# Altium PCB CAR_BOARD_2024-07-15.pcbdoc (part 1 of 2)
Units mil, origin at the board's own origin, x right, y up, seen from the top; angles counter-clockwise.
Board outline 4100 x 4517.05 mil, 2 copper layers (Top Layer, Bottom Layer); 71 components, 75 nets, 312 pads, 373 vias.
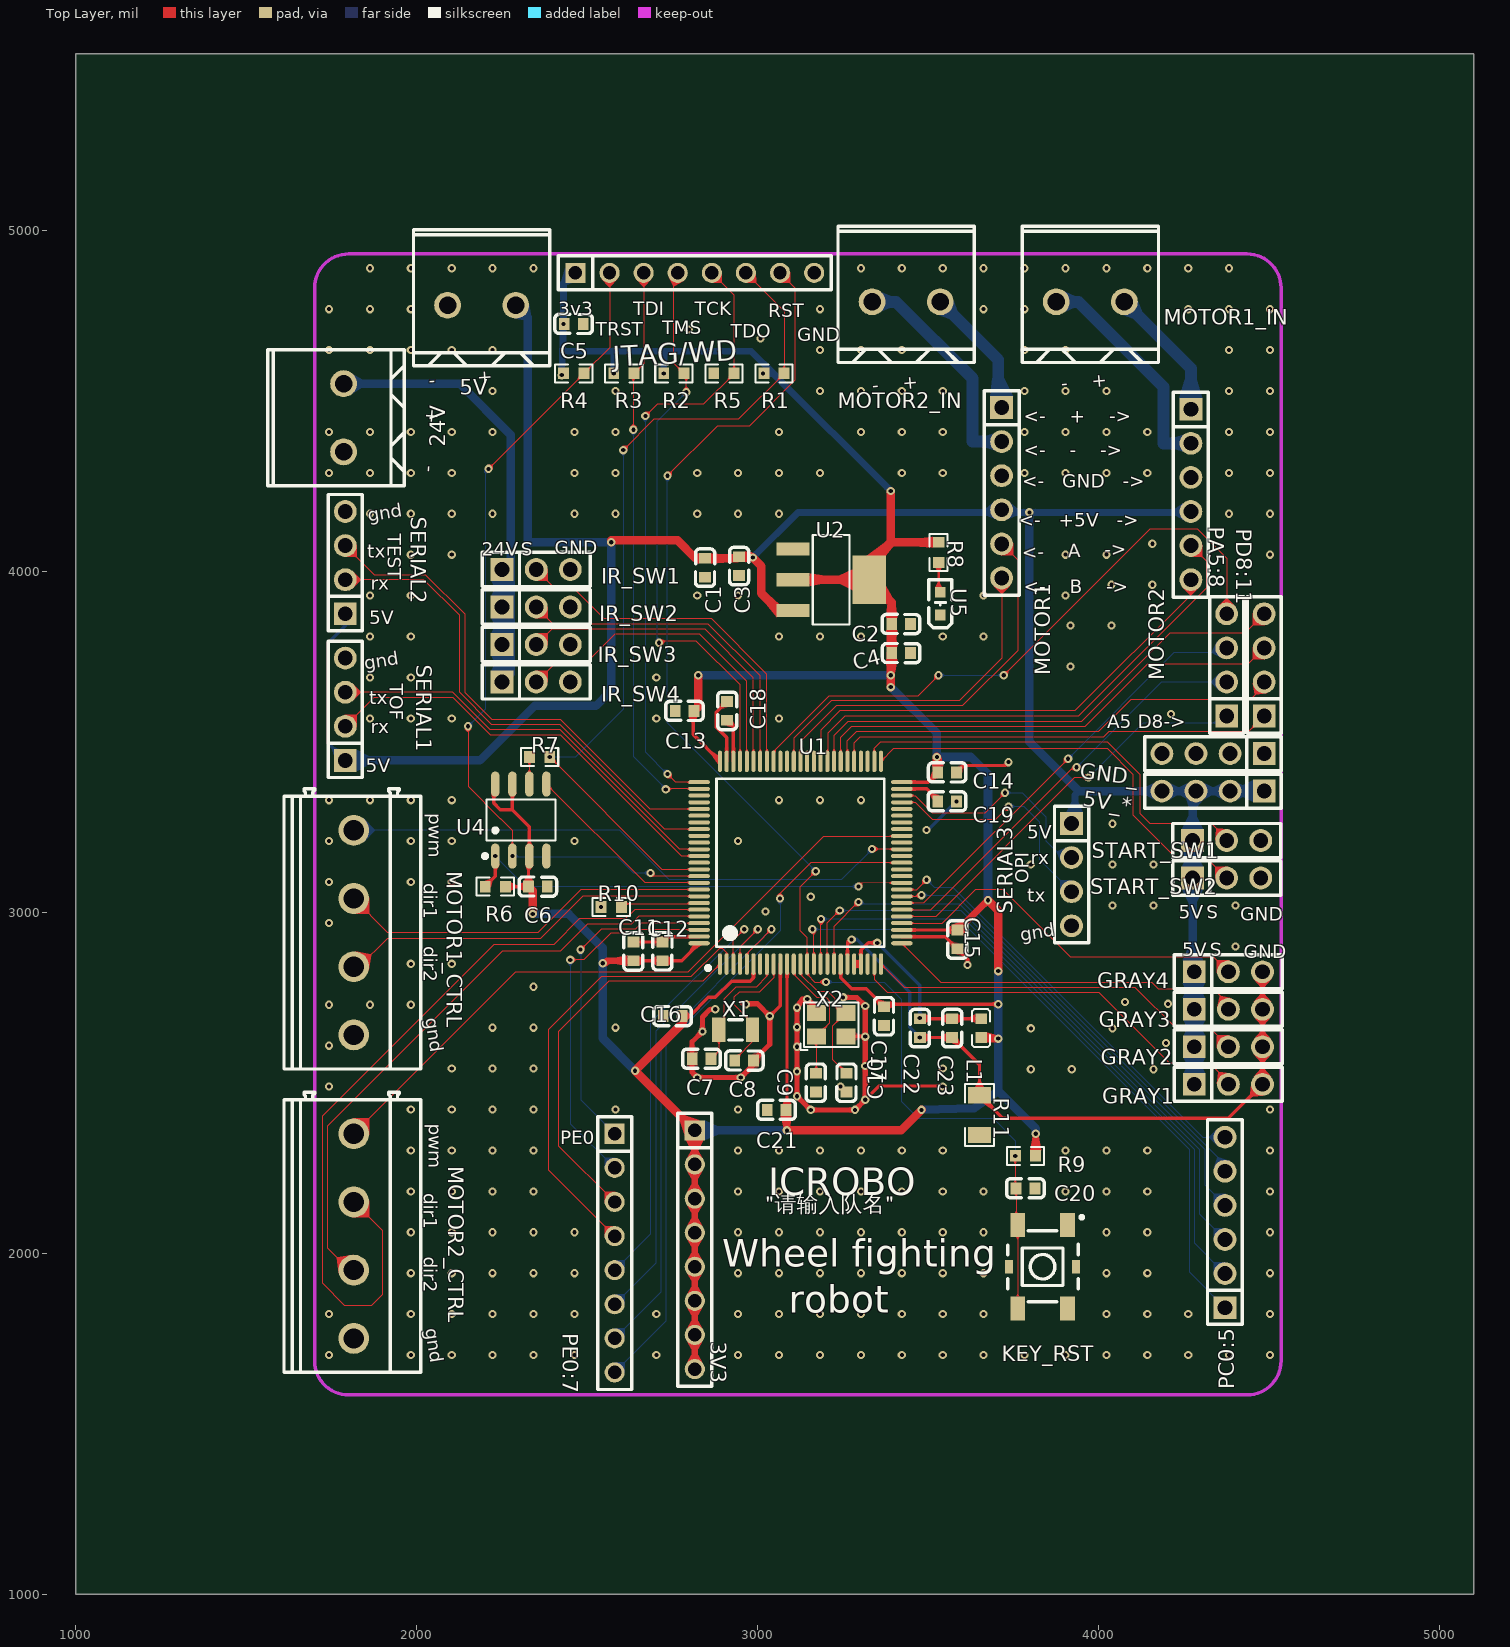
[diagram p0: Top Layer view]
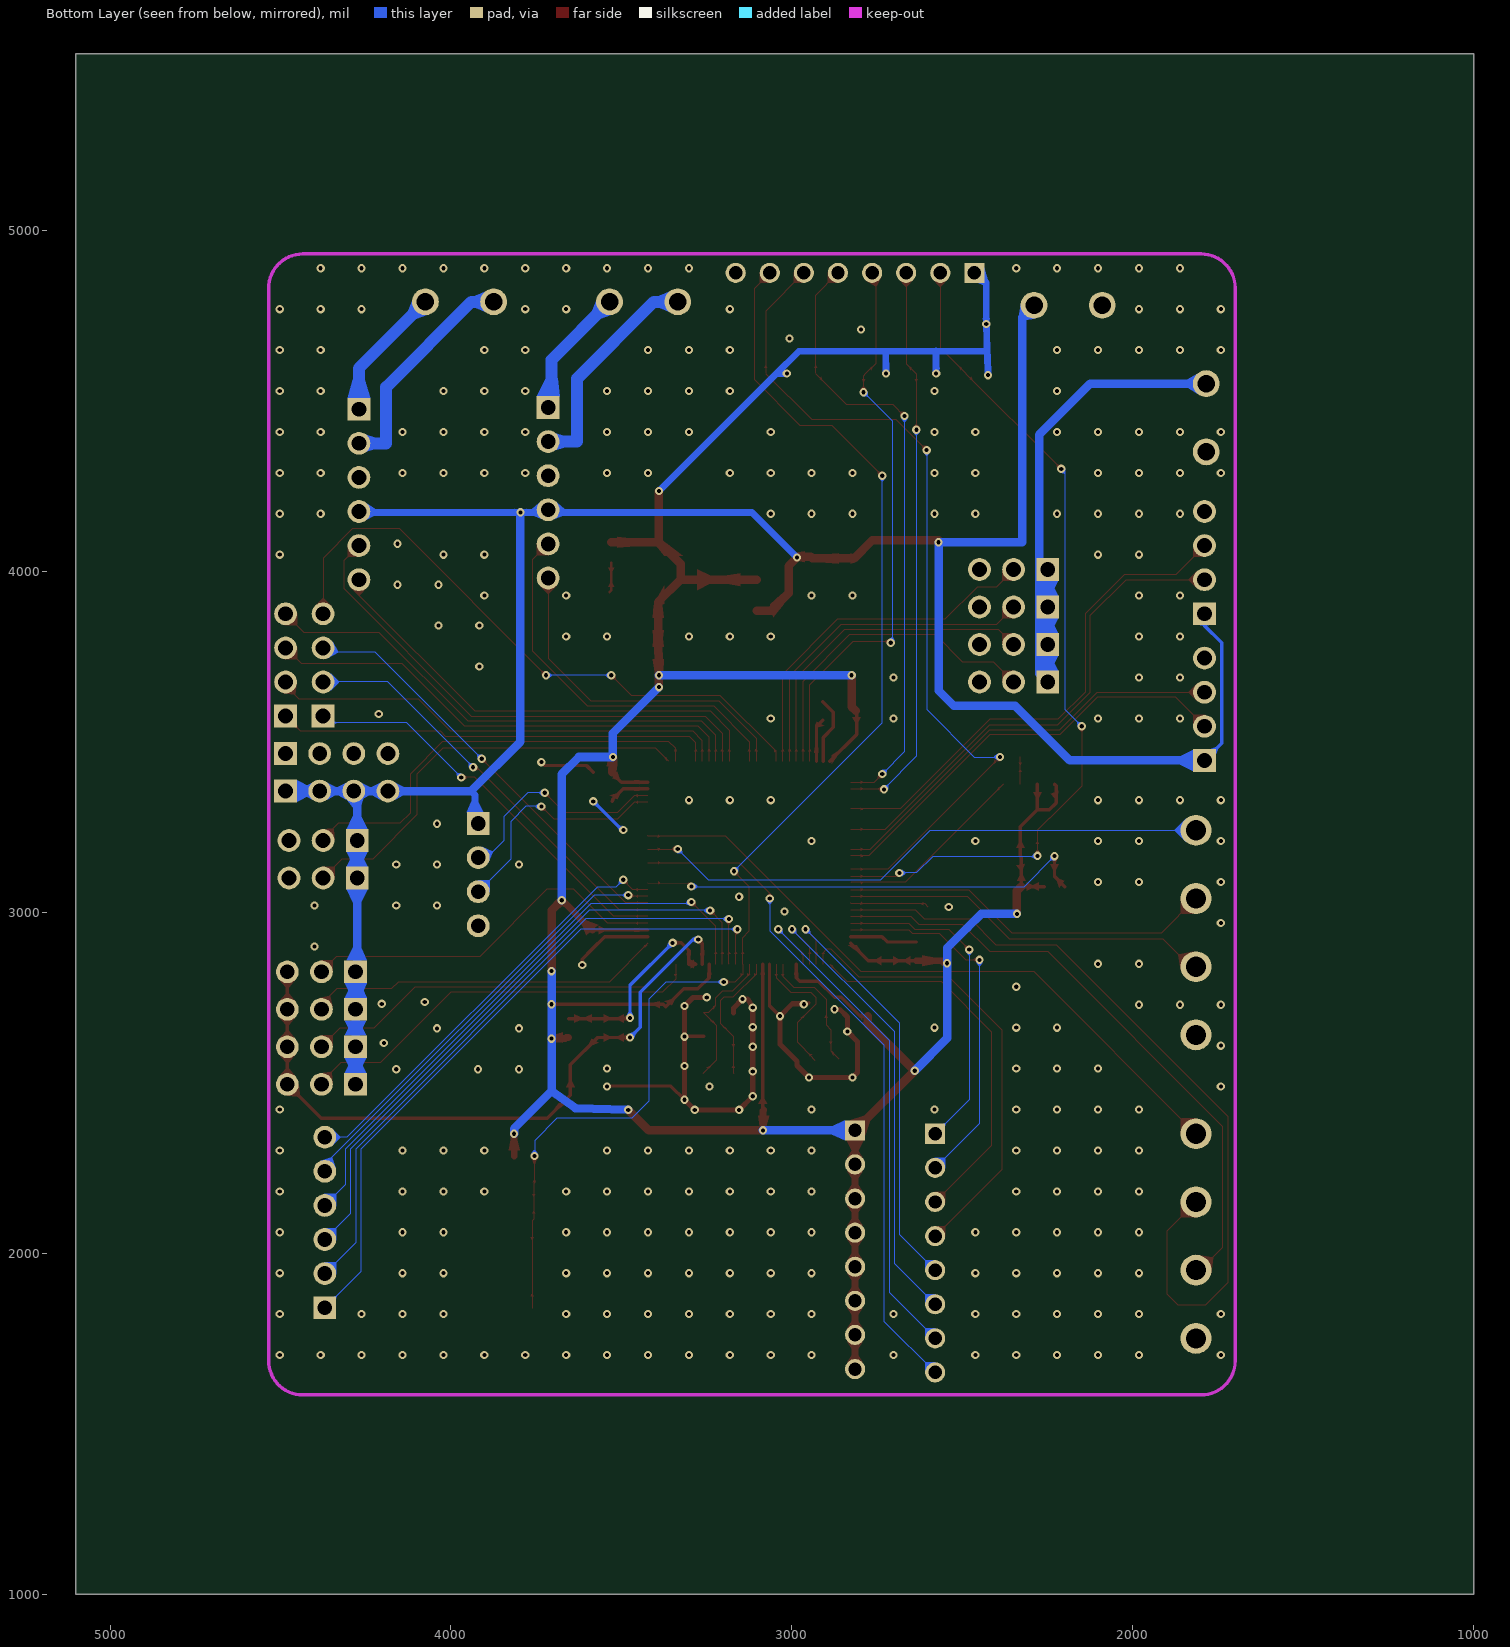
[diagram p1: Bottom Layer view, seen from below]

## Layer stack, top to bottom
Top Layer: signal copper (thickness not stored)
Dielectric: dielectric 12.6, FR-4, Dk 4.8
Bottom Layer: signal copper (thickness not stored)

## Board outline
5100,1000 1000,1000 1000,5517.05 5100,5517.05

## Components (designator, comment, footprint, x,y, rotation, side; value= is the part's Value field where it differs from the comment)
3V3 "PZ254V-11-08P" HDR-TH_8P-P2.54-V-M 2815,2010 r270 top
5V "WJ500V-5.08-2P-14-00A" CONN-TH_2P-P5.00_WJ500V-5.08-2P 2190,4780 r0 top
5V_* "PZ254V-11-04P_C2691448" HDR-TH_4P-P2.54-V-M 4335,3355 r180 top
24V "WJ500V-5.08-2P-14-00A" CONN-TH_2P-P5.00_WJ500V-5.08-2P 1785,4450 r90 top
C1 "10uF" C0603 2845,4010 r270 top
C2 "10uF" C0603 3420,3845 r0 top
C3 "100nF" C0603 2945,4015 r90 top
C4 "100nF" C0603 3420,3760 r180 top
C5 "100nF" C0603 2460,4725 r0 top
C6 "10uF" C0603 2355,3075 r0 top
C7 "12pF" C0603 2835,2570 r0 top
C8 "12pF" C0603 2960,2565 r180 top
C9 "20pF" C0603 3170,2500 r90 top
C10 "20pF" C0603 3260,2500 r90 top
C11 "10uF" C0603 2635,2885 r90 top
C12 "100nF" C0603 2720,2885 r270 top
C13 "100nF" C0603 2785,3590 r0 top
C14 "100nF" C0603 3555,3410 r180 top
C15 "100nF" C0603 3585,2920 r90 top
C16 "100nF" C0603 2750,2695 r0 top
C17 "100nF" C0603 3370,2695 r90 top
C18 "10uF" C0603 2910,3590 r270 top
C19 "10uF" C0603 3555,3325 r0 top
C20 "100nF" C0603 3785,2190 r0 top
C21 "100nF" C0603 3055,2420 r0 top
C22 "100nF" C0603 3475,2660 r90 top
C23 "1uF" C0603 3570,2660 r90 top
GND_ "PZ254V-11-04P_C2691448" HDR-TH_4P-P2.54-V-M 4335,3465 r180 top
GRAY1 "PZ254V-11-03P_C2937625" HDR-TH_3P-P2.54-V-M 4380,2495 r0 top
GRAY2 "PZ254V-11-03P_C2937625" HDR-TH_3P-P2.54-V-M 4380,2605 r0 top
GRAY3 "PZ254V-11-03P_C2937625" HDR-TH_3P-P2.54-V-M 4380,2715 r0 top
GRAY4 "PZ254V-11-03P_C2937625" HDR-TH_3P-P2.54-V-M 4380,2825 r0 top
IR_SW1 "PZ254V-11-03P_C2937625" HDR-TH_3P-P2.54-V-M 2350,4005 r0 top
IR_SW2 "PZ254V-11-03P_C2937625" HDR-TH_3P-P2.54-V-M 2350,3895 r0 top
IR_SW3 "PZ254V-11-03P_C2937625" HDR-TH_3P-P2.54-V-M 2350,3785 r0 top
IR_SW4 "PZ254V-11-03P_C2937625" HDR-TH_3P-P2.54-V-M 2350,3675 r0 top
JTAG/WD "PZ254V-11-08P" HDR-TH_8P-P2.54-V-M 2815,4875 r0 top
KEY_RST "TP10321620" SW-SMD_ROCPUSWITCHES_TP1032 3835,1960 r0 top
L1 "600Ω" L0603 3655,2660 r90 top
MOTOR1 "PZ254V-11-06P" HDR-TH_6P-P2.54-V-M 3715,4230 r270 top
MOTOR1_CTRL "DB128V-5.08-4P-GN-S" CONN-TH_4P-P5.08_DIBO_DB128V-5.08 1815,2940 r270 top
MOTOR1_IN "WJ500V-5.08-2P-14-00A" CONN-TH_2P-P5.00_WJ500V-5.08-2P 3975,4790 r0 top
MOTOR2 "PZ254V-11-06P" HDR-TH_6P-P2.54-V-M 4270,4225 r270 top
MOTOR2_CTRL "DB128V-5.08-4P-GN-S" CONN-TH_4P-P5.08_DIBO_DB128V-5.08 1815,2050 r270 top
MOTOR2_IN "WJ500V-5.08-2P-14-00A" CONN-TH_2P-P5.00_WJ500V-5.08-2P 3435,4790 r0 top
PA5:8 "PZ254V-11-04P_C2691448" HDR-TH_4P-P2.54-V-M 4375,3725 r90 top
PC0:5 "PZ254V-11-06P" HDR-TH_6P-P2.54-V-M 4370,2090 r90 top
PD8:11 "PZ254V-11-04P_C2691448" HDR-TH_4P-P2.54-V-M 4485,3725 r90 top
PE0:7 "PZ254V-11-08P" HDR-TH_8P-P2.54-V-M 2580,2000 r270 top
R1 "10kΩ" R0603 3047.36,4580 r180 top
R2 "10kΩ" R0603 2753.68,4580 r180 top
R3 "10kΩ" R0603 2606.84,4580 r180 top
R4 "10kΩ" R0603 2460,4580 r180 top
R5 "10kΩ" R0603 2900.52,4580 r0 top
R6 "10kΩ" R0603 2230,3075 r0 top
R7 "22Ω" R0603 2360,3455 r0 top
R8 "510Ω" R0603 3530,4055 r90 top
R9 "10kΩ" R0603 3785,2285 r0 top
R10 "10kΩ" R0603 2570,3015 r180 top
R11 "0Ω" R1206 3650,2405 r90 top
SERIAL1 "PZ254V-11-04P_C2691448" HDR-TH_4P-P2.54-V-M 1790,3595 r90 top
SERIAL2 "PZ254V-11-04P_C2691448" HDR-TH_4P-P2.54-V-M 1790,4025 r90 top
SERIAL3 "PZ254V-11-04P_C2691448" HDR-TH_4P-P2.54-V-M 3920,3110 r270 top
START_SW1 "PZ254V-11-03P_C2937625" HDR-TH_3P-P2.54-V-M 4375,3210.04 r0 top
START_SW2 "PZ254V-11-03P_C2937625" HDR-TH_3P-P2.54-V-M 4375,3100.04 r0 top
U1 "STM32F407VET6" LQFP-100_L14.0-W14.0-P0.50-LS16.0-BL 3125,3145 r0 top
U2 "AMS1117-3.3V" SOT-223-4_L6.5-W3.5-P2.30-LS7.0-BR 3215,3975 r180 top
U4 "W25Q16JVSNIQ TR" SOP-8_L4.9-W3.9-P1.27-LS6.0-BL 2305,3270 r0 top
U5 "0603LED" LED0603-R-RD_RED 3535,3905 r90 top
X1 "32.768kHz" FC-135R_L3.2-W1.5 2935,2655 r180 top
X2 "12MHz" OSC-SMD_4P-L3.2-W2.5-BL 3215,2670.03 r0 top

## Footprints (in the part's own frame and the unit in brackets; to place one, negate y for a bottom-side part, rotate by r counter-clockwise, add the part's x,y. Pads: shape width x height; smd on the part's side, far side on the other; paste and mask are expansions set on the pad)
C0603 [mm]
  rect 0.8x0.9 smd paste+0 mask+0.051: 1(-0.7,0) 2(0.7,0)
  silkscreen extent -1.41,-0.71 1.39,0.72
CONN-TH_2P-P5.00_WJ500V-5.08-2P [mm]
  round 2 hole 1.3 paste+0 mask+0.051: 1(-2.54,0) 2(2.54,0)
  silkscreen extent -5.08,-4.52 5.08,5.64
CONN-TH_4P-P5.08_DIBO_DB128V-5.08 [mm]
  round 2.3 hole 1.5 paste+0 mask+0.05: 1(-7.62,0) 2(-2.54,0) 3(2.54,0) 4(7.62,0)
  silkscreen extent -10.72,-5.2 10.16,5
FC-135R_L3.2-W1.5 [mm]
  rect 1x1.8 smd paste+0 mask+0.051: 1(-1.25,0) 2(1.25,0)
  silkscreen extent -0.51,-0.76 0.51,0.76
HDR-TH_3P-P2.54-V-M [mm]
  rect 1.7x1.7 hole 1.1 paste+0 mask+0.051: 1(-2.54,0)
  round 1.7 hole 1.1 paste+0 mask+0.051: 2(0,0) 3(2.54,0)
  silkscreen extent -4.02,-1.27 4.02,1.27
HDR-TH_4P-P2.54-V-M [mm]
  rect 1.7x1.7 hole 1.1 paste+0 mask+0.051: 1(-3.81,0)
  round 1.7 hole 1.1 paste+0 mask+0.051: 2(-1.27,0) 3(1.27,0) 4(3.81,0)
  silkscreen extent -5.08,-1.27 5.08,1.27
HDR-TH_6P-P2.54-V-M [mm]
  rect 1.7x1.7 hole 1.1 paste+0 mask+0.051: 1(-6.35,0)
  round 1.7 hole 1.1 paste+0 mask+0.051: 2(-3.81,0) 3(-1.27,0) 4(1.27,0) 5(3.81,0) 6(6.35,0)
  silkscreen extent -7.6,-1.3 7.65,1.3
HDR-TH_8P-P2.54-V-M [mm]
  rect 1.5x1.5 hole 1 paste+0 mask+0.051: 1(-8.89,0)
  round 1.5 hole 1 paste+0 mask+0.051: 2(-6.35,0) 3(-3.81,0) 4(-1.27,0) 5(1.27,0) 6(3.81,0) 7(6.35,0) 8(8.89,0)
  silkscreen extent -10.16,-1.27 10.16,1.27
L0603 [mm]
  rect 0.8x0.864 smd paste-100 mask+0.051: 1(-0.7,0) 2(0.7,0)
  silkscreen extent -1.42,-0.65 1.41,0.67
LED0603-R-RD_RED [mm]
  rect 0.8x0.8 smd paste+0 mask+0.051: 1(0.851,0) 2(-0.851,0)
  silkscreen extent -1.82,-0.86 1.77,0.86
LQFP-100_L14.0-W14.0-P0.50-LS16.0-BL [mm]
  oval 0.3x1.6 smd paste-100 mask+0.051: 1(-6,-7.55) 2(-5.5,-7.55) 3(-5,-7.55) 4(-4.5,-7.55) 5(-4,-7.55) 6(-3.5,-7.55) 7(-3,-7.55) 8(-2.5,-7.55) 9(-2,-7.55) 10(-1.5,-7.55) 11(-1,-7.55) 12(-0.5,-7.55) 13(0,-7.55) 14(0.5,-7.55) 15(1,-7.55) 16(1.5,-7.55) 17(2,-7.55) 18(2.5,-7.55) 19(3,-7.55) 20(3.5,-7.55) 21(4,-7.55) 22(4.5,-7.55) 23(5,-7.55) 24(5.5,-7.55) 25(6,-7.55) 51(6,7.55) 52(5.5,7.55) 53(5,7.55) 54(4.5,7.55) 55(4,7.55) 56(3.5,7.55) 57(3,7.55) 58(2.5,7.55) 59(2,7.55) 60(1.5,7.55) 61(1,7.55) 62(0.5,7.55) 63(0,7.55) 64(-0.5,7.55) 65(-1,7.55) 66(-1.5,7.55) 67(-2,7.55) 68(-2.5,7.55) 69(-3,7.55) 70(-3.5,7.55) 71(-4,7.55) 72(-4.5,7.55) 73(-5,7.55) 74(-5.5,7.55) 75(-6,7.55)
  oval 1.6x0.3 smd paste-100 mask+0.051: 26(7.55,-6) 27(7.55,-5.5) 28(7.55,-5) 29(7.55,-4.5) 30(7.55,-4) 31(7.55,-3.5) 32(7.55,-3) 33(7.55,-2.5) 34(7.55,-2) 35(7.55,-1.5) 36(7.55,-1) 37(7.55,-0.5) 38(7.55,0) 39(7.55,0.5) 40(7.55,1) 41(7.55,1.5) 42(7.55,2) 43(7.55,2.5) 44(7.55,3) 45(7.55,3.5) 46(7.55,4) 47(7.55,4.5) 48(7.55,5) 49(7.55,5.5) 50(7.55,6) 76(-7.55,6) 77(-7.55,5.5) 78(-7.55,5) 79(-7.55,4.5) 80(-7.55,4) 81(-7.55,3.5) 82(-7.55,3) 83(-7.55,2.5) 84(-7.55,2) 85(-7.55,1.5) 86(-7.55,1) 87(-7.55,0.5) 88(-7.55,0) 89(-7.55,-0.5) 90(-7.55,-1) 91(-7.55,-1.5) 92(-7.55,-2) 93(-7.55,-2.5) 94(-7.55,-3) 95(-7.55,-3.5) 96(-7.55,-4) 97(-7.55,-4.5) 98(-7.55,-5) 99(-7.55,-5.5) 100(-7.55,-6)
  silkscreen extent -7.03,-8 6.25,6.25
OSC-SMD_4P-L3.2-W2.5-BL [mm]
  rect 1.4x1.2 smd paste+0 mask+0.051: 1(-1.1,-0.875) 2(1.1,-0.875) 3(1.1,0.875) 4(-1.1,0.875)
  silkscreen extent -2.29,-1.9 2.03,1.65
R0603 [mil]
  rect 31.75x34.02 smd paste-3937.01 mask+2: 1(-29.66,0) 2(29.66,0)
  silkscreen extent -55,-26 55,26
R1206 [mil]
  rect 47.54x66.97 smd paste-3937.01 mask+2: 1(-58.22,0) 2(58.22,0)
  silkscreen extent -91,-42 91,42
SOP-8_L4.9-W3.9-P1.27-LS6.0-BL [mm]
  oval 0.63x1.865 smd paste+0 mask+0.051: 1(-1.905,-2.682) 2(-0.635,-2.682) 3(0.635,-2.682) 4(1.905,-2.682) 5(1.905,2.683) 6(0.635,2.683) 7(-0.635,2.683) 8(-1.905,2.683)
  silkscreen extent -2.82,-2.83 2.58,1.52
SOT-223-4_L6.5-W3.5-P2.30-LS7.0-BR [mm]
  rect 2.47x0.98 smd paste+0 mask+0.051: 1(2.835,-2.3) 2(2.835,0) 3(2.835,2.3)
  rect 2.47x3.6 smd paste+0 mask+0.051: 4(-2.835,0)
  silkscreen extent -1.37,-3.33 1.37,3.33
SW-SMD_ROCPUSWITCHES_TP1032 [mm]
  rect 1.1x1.8 smd paste+0 mask+0.051: 1(1.85,3.1) 2(1.85,-3.1) 3(-1.85,3.1) 4(-1.85,-3.1)
  rect 0.6x1 smd paste+0 mask+0.051: 5(2.5,0) 6(-2.5,0)
  silkscreen extent -2.6,-2.6 3.05,3.81

## Via types
v1: diameter 24, hole 12, Top Layer to Bottom Layer, tented both sides, 284 vias
v2: diameter 24.41, hole 12.2, Top Layer to Bottom Layer, tented both sides, 89 vias

## Nets (pads, with @x,y where several pads share a name; then routed paths per layer and width w, separated by ;. In a path a pad name is that pad's centre, name@x,y a point inside that pad or via, vN(x,y) a via of type N, cw(c..) or ccw(c..) an arc to the next point about the centre after c; other vN are vias at no path point)
24V: 24V.2 IR_SW1.1 IR_SW2.1 IR_SW3.1 IR_SW4.1 | length 1617.9
  Bottom Layer w25: 24V.2@1785,4550 2125,4550.04 2275,4400.04 2275,3699.64 IR_SW4.1@2250,3674.64 ; IR_SW4.1@2250,3675 IR_SW3.1@2250,3785 IR_SW2.1@2250,3895 IR_SW1.1@2250,4005
+5V: 5V.2 5V_*.1 5V_*.2 5V_*.3 5V_*.4 C1.1 C3.2 GRAY1.1 GRAY2.1 GRAY3.1 GRAY4.1 MOTOR1.4 MOTOR2.4 SERIAL1.1 SERIAL2.1 SERIAL3.1 START_SW1.1 START_SW2.1 U2.3 | length 7832.1
  Top Layer w25: v2(2570,4085) 2570,4090.04 2765,4090.04 2817.4,4037.54 2845,4037.54 2940,4037.54 2945,4042.54 2982.4,4042.54 v2(2985,4040) 3010,4015.04 3010,3935.04 3060.6,3884.44 U2.3@3103.39,3884.45
  Bottom Layer w10: SERIAL1.1@1790,3445 1740,3495.04 1740,3790.04 1790,3840.04 SERIAL2.1@1790,3875
  Bottom Layer w20: v2(2985,4040) 3117.53,4172.53 v2(3796.3,4172.53) ; MOTOR1.4@3710,4165 3710,4175 MOTOR1.4@3715,4180 3722.47,4172.53 v2(3796.3,4172.53) ; SERIAL3.1@3920,3260 3930,3270.04 3930,3343.74 3941.3,3355.04 ; MOTOR2.4@4270,4175 4267.53,4172.53 v2(3796.3,4172.53)
  Bottom Layer w25: SERIAL1.1@1790,3445 2185,3445.04 2345,3605.04 2525,3605.04 2570,3650.04 v2(2570,4085) ; 5V.2@2290,4780 2325,4745 2325,4085 v2(2570,4085) ; v2(3796.3,4172.53) 3796.3,3500 3941.3,3355 5V_*.4@4185,3355 5V_*.3@4300,3355 ; GRAY4.1@4280,2825 GRAY2.1@4280,2605 GRAY1.1@4280,2495 GRAY3.1@4280,2715 4275,2715.04 START_SW1.1@4275,3210.04 START_SW2.1@4275,3100.04 4275,3345.04 5V_*.3@4285,3355 ; 5V_*.3@4285,3355 5V_*.2@4400,3355 ; 5V_*.2@4385,3355 5V_*.1@4500,3355.04
FLASH_CS: R6.1 U1.35 U4.1 | length 1335
  Top Layer w3.5: v2(3295,3075) 3305,3085.04 U1.35@3422.24,3085.94
  Top Layer w10: R6.1@2200.34,3075 2230,3105.04 v2(2230,3164.4)
  Bottom Layer w3.5: v2(2230,3164.4) 2319.39,3075 v2(3295,3075)
GND: 5V.1 24V.1 C1.2 C2.2 C3.1 C4.1 C5.2 C6.2 C7.1 C8.1 C9.1 C10.1 C11.2 C12.1 C13.1 C14.1 C15.1 C16.1 C17.1 C18.1 C19.2 C20.2 C21.1 GND_.1 GND_.2 GND_.3 GND_.4 IR_SW1.3 IR_SW2.3 IR_SW3.3 IR_SW4.3 JTAG/WD.8 KEY_RST.1 KEY_RST.2 KEY_RST.5 KEY_RST.6 MOTOR1.3 MOTOR1_CTRL.4 MOTOR2.3 MOTOR2_CTRL.4 R5.1 R10.2 R11.1 SERIAL1.4 SERIAL2.4 SERIAL3.4 START_SW1.3 START_SW2.3 U1.10 U1.27 U1.74 U1.99 U2.1 U4.4 U5.2 X2.2 X2.4 | length 3014.9
  Top Layer w10: C11.2@2635,2912.54 2720,2912.54 2735.9,2928.44 U1.99@2827.8,2928.44 ; U1.74@2908.46,3442.24 2908.5,3512.24 2878.5,3542.24 2878.5,3586.04 C18.1@2910,3617.54 ; 2950,2735 2955,2730 v2(2965,2730) ; v2(3035,2695) 3065.9,2725.94 U1.10@3065.9,2847.74 ; X2.2@3258.3,2635.54 v2@3315,2635.54 ; v2(3315,2450) 3355,2490 v1@3540,2490 ; U1.27@3422.2,2928.44 3549,2928.44 C15.1@3585,2892.45 3615,2862.44 v2(3615,2845) ; C14.1@3582.55,3410 3602.6,3430.04 3725,3430.04 v2(3735,3440)
  Top Layer w15: v2(2875,2715) 2860,2715.04 2837.4,2692.44 v2(2837.44,2650) 2807.4,2620.04 C7.1@2807.45,2570 2807.4,2530.04 v2(2822.44,2515) v2(2950,2515) 2985,2550.04 2985,2562.44 C8.1@2987.55,2565 3035,2612.44 v2(3035,2695) ; v2@2968.8,2731.2 2998.8,2731.2 v2(3035,2695) 3033.8,2696.2 v2@3028.8,2696.2 ; v2(3145,2745) 3130,2745 v2(3115,2720) v2(3115,2662.68) v2(3115,2605) v2(3115,2532.91) v2(3115,2460) v2(3155,2420) v2(3285,2420) v2(3315,2450) v2(3315,2548.91) v2(3315,2634.89) v2(3315,2725) 3290,2750 v2(3250,2750) ; v2(3145,2745) 3171.7,2718.34 X2.4@3171.7,2704.49
  Bottom Layer w10: v1@3495,3240 3500,3245 3502.56,3245 v2(3582.56,3325)
  other v1: 1742.2,1701.09 1982.2,1701.09 2102.2,1701.09 2222.2,1701.09 2342.2,1701.09 2462.2,1701.09 2702.2,1701.09 2942.2,1701.09 3062.2,1701.09 3182.2,1701.09 3302.2,1701.09 3422.2,1701.09 3542.2,1701.09 3662.2,1701.09 3782.2,1701.09 3902.2,1701.09 4022.2,1701.09 4142.2,1701.09 4262.2,1701.09 4382.2,1701.09 4502.2,1701.09 1742.2,1821.09 1982.2,1821.09 2102.2,1821.09 2222.2,1821.09 2342.2,1821.09 2462.2,1821.09 2702.2,1821.09 2942.2,1821.09 3062.2,1821.09 3182.2,1821.09 3302.2,1821.09 3422.2,1821.09 3542.2,1821.09 3662.2,1821.09 4022.2,1821.09 4142.2,1821.09 4262.2,1821.09 4502.2,1821.09 1982.2,1941.09 2102.2,1941.09 2222.2,1941.09 2342.2,1941.09 2462.2,1941.09 2942.2,1941.09 3062.2,1941.09 3182.2,1941.09 3302.2,1941.09 3422.2,1941.09 3542.2,1941.09 3662.2,1941.09 4022.2,1941.09 4142.2,1941.09 4502.2,1941.09 1982.2,2061.09 2102.2,2061.09 2222.2,2061.09 2342.2,2061.09 2462.2,2061.09 2942.2,2061.09 3062.2,2061.09 3182.2,2061.09 3302.2,2061.09 3422.2,2061.09 3542.2,2061.09 3662.2,2061.09 4022.2,2061.09 4142.2,2061.09 4502.2,2061.09 1982.2,2181.09 2102.2,2181.09 2222.2,2181.09 2342.2,2181.09 2942.2,2181.09 3062.2,2181.09 3182.2,2181.09 3302.2,2181.09 3422.2,2181.09 3542.2,2181.09 3662.2,2181.09 3902.2,2181.09 4022.2,2181.09 4142.2,2181.09 4502.2,2181.09 1982.2,2301.09 2102.2,2301.09 2222.2,2301.09 2342.2,2301.09 2942.2,2301.09 3062.2,2301.09 3182.2,2301.09 3302.2,2301.09 3422.2,2301.09 3542.2,2301.09 3902.2,2301.09 4022.2,2301.09 4142.2,2301.09 4502.2,2301.09 1982.2,2421.09 2102.2,2421.09 2222.2,2421.09 2342.2,2421.09 2582.2,2421.09 2942.2,2421.09 4502.2,2421.09 1742.2,2488.4 3242.2,2488.4 3542.2,2488.4 3800.55,2539.33 3920.55,2539.33 4160.55,2539.33 2102.2,2541.09 2222.2,2541.09 2342.2,2541.09 3542.2,2541.09 1742.2,2608.4 4196.96,2616.09 3800.55,2659.33 4040.55,2659.33 2222.2,2661.09 2342.2,2661.09 2582.2,2661.09 1742.2,2728.4 1862.2,2728.4 1982.2,2728.4 4203.06,2731.09 4076.96,2736.09 2342.2,2781.09 1982.2,2848.4 2102.2,2848.4 4400.55,2899.33 1742.2,2968.4 3022.03,3001.6 4040.55,3019.33 4160.55,3019.33 4400.55,3019.33 1742.2,3088.4 1982.2,3088.4 2102.2,3088.4 3800.55,3139.33 4040.55,3139.33 4160.55,3139.33 1742.2,3208.4 1982.2,3208.4 2102.2,3208.4 2462.2,3208.4 2942.2,3208.4 3494.57,3241.3 4040.55,3259.33 1742.2,3328.4 1862.2,3328.4 1982.2,3328.4 2102.2,3328.4 3062.2,3328.4 3182.2,3328.4 3302.2,3328.4 1862.2,3568.4 1982.2,3568.4 2102.2,3568.4 2702.2,3568.4 3062.2,3568.4 4211.96,3581.09 1862.2,3688.4 1982.2,3688.4 2702.2,3688.4 3916.96,3720.34 1862.2,3808.4 1982.2,3808.4 3062.2,3808.4 3182.2,3808.4 3302.2,3808.4 3542.2,3808.4 3662.2,3808.4 3916.96,3840.34 4036.96,3840.34 1862.2,3928.4 1982.2,3928.4 2822.2,3928.4 2942.2,3928.4 3662.2,3928.4 3902.2,3928.4 4036.96,3960.34 4156.96,3960.34 1982.2,4048.4 2102.2,4048.4 3902.2,4048.4 4022.2,4048.4 4502.2,4048.4 4156.96,4080.34 1862.2,4168.4 1982.2,4168.4 2102.2,4168.4 2222.2,4168.4 2462.2,4168.4 2582.2,4168.4 2822.2,4168.4 2942.2,4168.4 3062.2,4168.4 4382.2,4168.4 4502.2,4168.4 1742.2,4288.4 1862.2,4288.4 1982.2,4288.4 2102.2,4288.4 2462.2,4288.4 2582.2,4288.4 2822.2,4288.4 2942.2,4288.4 3062.2,4288.4 3182.2,4288.4 3422.2,4288.4 3542.2,4288.4 3782.2,4288.4 3902.2,4288.4 4022.2,4288.4 4142.2,4288.4 4382.2,4288.4 4502.2,4288.4 1742.2,4408.4 1862.2,4408.4 1982.2,4408.4 2102.2,4408.4 2222.2,4408.4 2462.2,4408.4 2582.2,4408.4 3062.2,4408.4 3302.2,4408.4 3422.2,4408.4 3542.2,4408.4 3782.2,4408.4 3902.2,4408.4 4022.2,4408.4 4142.2,4408.4 4382.2,4408.4 4502.2,4408.4 2222.2,4528.4 2582.2,4528.4 3182.2,4528.4 3302.2,4528.4 3422.2,4528.4 3542.2,4528.4 3782.2,4528.4 3902.2,4528.4 4022.2,4528.4 4382.2,4528.4 4502.2,4528.4 1742.2,4648.4 1862.2,4648.4 1982.2,4648.4 2102.2,4648.4 2222.2,4648.4 3182.2,4648.4 3302.2,4648.4 3422.2,4648.4 3782.2,4648.4 3902.2,4648.4 4382.2,4648.4 4502.2,4648.4 3007.48,4682.75 2797.25,4708.9 1742.2,4768.4 1862.2,4768.4 1982.2,4768.4 3182.2,4768.4 3662.2,4768.4 3782.2,4768.4 4262.2,4768.4 4382.2,4768.4 4502.2,4768.4 1862.2,4888.4 1982.2,4888.4 2102.2,4888.4 2222.2,4888.4 2342.2,4888.4 3302.2,4888.4 3422.2,4888.4 3542.2,4888.4 3662.2,4888.4 3782.2,4888.4 3902.2,4888.4 4022.2,4888.4 4142.2,4888.4 4262.2,4888.4 4382.2,4888.4
  other v2: 2540.34,3015
GNDA: C22.1 C23.1 GRAY1.3 GRAY2.3 GRAY3.3 GRAY4.3 R11.2 U1.20 | length 1983.6
  Top Layer w10: U1.20@3262.8,2847.74 3262.8,2907.84 v2(3275,2920) ; v2(3475,2632.44) C23.1@3570,2632.45 3650,2552.44 R11.2@3650,2463.22 3718.2,2395.04 4380,2395.04 GRAY1.3@4480,2495 ; GRAY1.3@4480,2495 GRAY2.3@4480,2605 GRAY3.3@4480,2715 GRAY4.3@4480,2825
  Bottom Layer w10: v2(3275,2920) 3290,2920 3445,2765 3445,2662.44 v2(3475,2632.44)
GRAY1: GRAY1.2 U1.24 | length 1214.3
  Top Layer w3.5: U1.24@3341.54,2847.76 3341.5,2803.14 3379.7,2765.04 4000,2765.04 4207.3,2557.74 4323.3,2557.74 4380,2501.04 GRAY1.2@4380,2495
GRAY2: GRAY2.2 U1.25 | length 1119.4
  Top Layer w3.5: U1.25@3361.22,2847.76 3429,2780.04 4106.1,2780.04 4227.2,2658.94 4326.1,2658.94 GRAY2.2@4380,2605
GRAY3: GRAY3.2 U1.26 | length 1046.9
  Top Layer w3.5: U1.26@3422.24,2908.78 3536,2795.04 4155,2795.04 4175,2775.04 4335,2775.04 4380,2730.04 GRAY3.2@4380,2715
GRAY4: GRAY4.2 U1.29 | length 1098.8
  Top Layer w3.5: U1.29@3422.24,2967.83 3540.8,2967.84 3639.6,3066.64 3718.7,3066.64 3916.3,2869.04 4336,2869.04 GRAY4.2@4380,2825
IR_SW1: IR_SW1.2 U1.68 | length 1059.8
  Top Layer w3.5: IR_SW1.2@2350,4005 2400,3955.04 2455,3955.04 2550,3860.04 2865,3860.04 3026.6,3698.44 U1.68@3026.57,3442.24
IR_SW2: IR_SW2.2 U1.69 | length 991.4
  Top Layer w3.5: IR_SW2.2@2350,3895 2400,3845.04 2855,3845.04 3006.9,3693.14 U1.69@3006.89,3442.24
IR_SW3: IR_SW3.2 U1.70 | length 960.3
  Top Layer w3.5: IR_SW3.2@2350,3785 2395,3830.04 2845,3830.04 2987.2,3687.84 U1.70@2987.2,3442.24
IR_SW4: IR_SW4.2 U1.71 | length 967.6
  Top Layer w3.5: IR_SW4.2@2350,3675 2410,3735.04 2500,3735.04 2580,3814.94 2830.1,3814.94 2967.5,3677.54 U1.71@2967.52,3442.24
M1_ENCODER_A: MOTOR1.5 U1.63 | length 1137.6
  Top Layer w3.5: U1.63@3125,3442.24 3125,3500.04 3230,3605.04 3600,3605.04 3761.7,3766.74 3761.7,4033.34 MOTOR1.5@3715,4080
M1_ENCODER_B: MOTOR1.6 U1.64 | length 1010
  Top Layer w3.5: U1.64@3105.32,3442.24 3105.3,3510.34 3215,3620.04 3590,3620.04 3715,3745.04 MOTOR1.6@3715,3980
M2_ENCODER_A: MOTOR2.5 U1.59 | length 1512.7
  Top Layer w3.5: U1.59@3203.74,3442.24 3205,3443.54 3205,3525.04 3255,3575.04 3940,3575.04 4314.6,3949.64 4314.6,4030.44 MOTOR2.5@4270,4075
M2_ENCODER_B: MOTOR2.6 U1.60 | length 1386.8
  Top Layer w3.5: U1.60@3184.06,3442.24 3184.1,3534.14 3240,3590.04 3930,3590.04 4270,3930.04 MOTOR2.6@4270,3975
MOTOR1_1: MOTOR1.1 MOTOR2_IN.2 | length 384.6
  Bottom Layer w35: MOTOR2_IN.2@3535,4790 3705,4620.04 3705,4490.04 MOTOR1.1@3715,4480
MOTOR1_2: MOTOR1.2 MOTOR2_IN.1 | length 658.2
  Bottom Layer w35: MOTOR2_IN.1@3335,4790 3405,4790.04 3630,4565.04 3630,4380.04 MOTOR1.2@3715,4380
MOTOR1_DIR1: MOTOR1_CTRL.2 U1.92 | length 1106.5
  Top Layer w3.5: MOTOR1_CTRL.2@1815,3040 1915,2940.04 2355,2940.04 2481.3,3066.34 U1.92@2827.76,3066.26
MOTOR1_DIR2: MOTOR1_CTRL.3 U1.93 | length 1098.4
  Top Layer w3.5: MOTOR1_CTRL.3@1815,2840 1830,2840.04 1912.5,2922.54 2362.5,2922.54 2486.6,3046.64 U1.93@2827.76,3046.57
MOTOR1_PWM: MOTOR1_CTRL.1 U1.40 | length 1704.9
  Top Layer w3.5: v2(3335,3185) 3421.6,3185.04 U1.40@3422.2,3184.34
  Bottom Layer w3.5: MOTOR1_CTRL.1@1815,3240 2595,3240.04 2740,3095.04 3245,3095.04 v2(3335,3185)
MOTOR2_1: MOTOR1_IN.2 MOTOR2.1 | length 395.8
  Bottom Layer w35: MOTOR1_IN.2@4075,4790 4270,4595.04 MOTOR2.1@4270,4475
MOTOR2_2: MOTOR1_IN.1 MOTOR2.2 | length 663.6
  Bottom Layer w35: MOTOR1_IN.1@3875,4790 3940,4790.04 4190,4540.04 4190,4375.04 MOTOR2.2@4270,4374.64
MOTOR2_DIR1: MOTOR2_CTRL.2 U1.95 | length 2369.5
  Top Layer w3.5: MOTOR2_CTRL.2@1815,2150 1900,2065.04 1900,1880.04 1867.3,1847.34 1787.7,1847.34 1721.9,1913.14 1721.9,2401.84 2225,2905.04 2401.9,2905.04 2476.9,2980.04 2611.8,2980.04 2639,3007.24 U1.95@2827.76,3007.2
MOTOR2_DIR2: MOTOR2_CTRL.3 U1.96 | length 1806.7
  Top Layer w3.5: MOTOR2_CTRL.3@1815,1950 1802.8,1950.04 1737.6,2015.24 1737.6,2372.64 2250,2885.04 2420,2885.04 2500,2965.04 2628.5,2965.04 2651,2987.54 U1.96@2827.76,2987.52
MOTOR2_PWM: MOTOR2_CTRL.1 U1.42 | length 1969.1
  Top Layer w3.5: MOTOR2_CTRL.1@1815,2350 2290,2825.04 2796.4,2825.04 3193.8,3222.44 3420.9,3222.44 U1.42@3422.24,3223.74
OPI_RX: SERIAL3.2 U1.48 | length 662.4
  Top Layer w3.5: U1.48@3422.24,3341.85 3462.2,3341.84 3512.2,3291.84 3666.9,3291.84 v2(3725,3350)
  Bottom Layer w3.5: v2(3725,3350) 3775,3350 3845,3280 3845,3210 3895,3160 SERIAL3.2@3920,3160
OPI_TX: SERIAL3.3 U1.47 | length 702.2
  Top Layer w3.5: U1.47@3422.2,3322.14 3462.2,3322.14 3512.2,3272.14 3697.2,3272.14 v2(3735,3310)
  Bottom Layer w3.5: v2(3735,3310) 3780,3310 3825,3265 3825,3155 SERIAL3.3@3920,3060
OSC32_N: C7.2 U1.8 X1.2 | length 380.9
  Top Layer w3.5: C7.2@2862.55,2570 2885.8,2593.24 X1.2@2885.79,2655 2900,2669.24 2900,2745.04 2935,2780.04 2995,2780.04 3026.6,2811.64 U1.8@3026.57,2847.76
OSC32_P: C8.2 U1.9 X1.1 | length 409.2
  Top Layer w3.5: C8.2@2932.45,2565 2940,2572.54 2940,2575.04 2984.2,2619.24 X1.1@2984.21,2655 2984.2,2675.84 2930,2730.04 2930,2750.04 2945,2765.04 3003.5,2765.04 3046.3,2807.84 U1.9@3046.26,2847.76
OSC_N: C9.2 U1.12 X2.1 | length 395.9
  Top Layer w3.5: U1.12@3105.3,2847.74 3105.3,2817.74 3173.1,2750.04 3200,2750.04 3210,2740.04 3210,2673.84 3171.7,2635.54 3171.7,2529.24 C9.2@3170,2527.54
OSC_P: C10.2 U1.13 X2.3 | length 432.9
  Top Layer w3.5: U1.13@3125,2847.74 3125,2817.74 3175,2767.74 3205,2767.74 3225,2747.74 3225,2725.04 3245.6,2704.44 3258.3,2704.44 3220,2666.14 3220,2567.54 C10.2@3260,2527.54
PA5: PA5:8.1 U1.30 | length 1196.2
  Top Layer w3.5: U1.30@3422.24,2987.52 3522.5,2987.54 3930,3395.04 v2(3970,3395)
  Bottom Layer w3.5: v2(3970,3395) 4130,3555.04 4355,3555.04 PA5:8.1@4375,3575
PA6: PA5:8.2 U1.31 | length 1229.4
  Top Layer w3.5: U1.31@3422.24,3007.2 3507.2,3007.24 3925,3425.04 v2(3935,3425)
  Bottom Layer w3.5: v2(3935,3425) 4185,3675 PA5:8.2@4375,3675
PA7: PA5:8.3 U1.32 | length 1262.7
  Top Layer w3.5: U1.32@3422.2,3026.84 3486.9,3026.84 v2(3910,3450)
  Bottom Layer w3.5: v2(3910,3450) 4221.94,3761.94 4361.94,3761.94 PA5:8.3@4375,3775
PA8: PA5:8.4 U1.67 | length 1835.9
  Top Layer w3.5: U1.67@3046.26,3442.24 3046.3,3471.34 3210,3635.04 3470,3635.04 v2(3530,3695) ; v2(3721.39,3695) 4150.7,4124.3 4289.2,4124.3 4375,4038.5 PA5:8.4@4375,3875
  Bottom Layer w3.5: v2(3530,3695) v2@3730,3695
PA13/TMS: JTAG/WD.4 R2.1 U1.72 | length 1666
  Top Layer w3.5: v2(2710,3790) 2710,3795.04 2820,3795.04 2947.8,3667.14 U1.72@2947.83,3442.24 ; JTAG/WD.4@2765,4875 2753.3,4863.34 2753.3,4610.04 R2.1@2783.33,4580 2790,4573.34 v2(2790,4525)
  Bottom Layer w3.5: v2(2710,3790) 2705,3790 2705,4440 v2(2790,4525)
PA14/TCK: JTAG/WD.5 R5.2 U1.76 | length 1813.4
  Top Layer w3.5: v2(2670,4455) 2705,4490.04 2840.5,4490.04 R5.2@2930.2,4579.64 ; v2(2735,3405) 2758.8,3381.24 U1.76@2827.76,3381.22 ; JTAG/WD.5@2865,4875 2930.2,4809.84 R5.2@2930.17,4580
  Bottom Layer w3.5: v2(2670,4455) 2670,3470 v2(2735,3405)
PA15/TDI: JTAG/WD.3 R3.1 U1.77 | length 1665.2
  Top Layer w3.5: v2(2635,4415) 2635,4578.54 R3.1@2636.49,4580 2665,4608.54 JTAG/WD.3@2665,4875 ; v2(2730,3360) 2736.2,3360.04 2737.8,3361.54 U1.77@2827.76,3361.54
  Bottom Layer w3.5: v2(2635,4415) 2635,3456.54 2730,3361.54 v2(2730,3360)
PB3/TDO: JTAG/WD.6 R1.1 R7.2 U1.89 | length 2508.8
  Top Layer w3.5: v2(2389.7,3455) 2718.6,3126.04 U1.89@2827.76,3125.32 ; v2(2605,4355) 2695,4445.04 2942.4,4445.04 R1.1@3077,4579.64 ; JTAG/WD.6@2965,4875 3077,4762.94 R1.1@3077.01,4580
  Bottom Layer w3.5: v2@2395,3455 2465,3455 2605,3595 v2(2605,4355)
PB4/TRST: JTAG/WD.2 R4.1 U1.90 U4.2 | length 2515
  Top Layer w3.5: v2(2150,3545) 2150,3369.64 2245,3274.64 ; v2(2210,4300) 2225,4315.04 R4.1@2489.7,4579.64 ; 2245,3275.04 2280,3240.04 U4.2@2280,3164.34 ; R4.1@2489.66,4580 2565,4655.34 JTAG/WD.2@2565,4875 ; v2(2685,3115) 2695,3105.04 U1.90@2827.76,3105.63
  Bottom Layer w3.5: v2(2150,3545) 2200,3595.04 2200,4300.04 v2(2210,4300) ; v2(2280,3165) 2282.6,3162.4 2587.6,3162.4 2635,3115 v2(2685,3115)
PC0: PC0:5.1 U1.15 | length 1984.8
  Top Layer w3.5: v2(3160,2950) 3164.4,2945.64 U1.15@3164.4,2847.74
  Bottom Layer w3.5: v2(3160,2950) 3620,2950.04 4265,2305.04 4265,1945.04 PC0:5.1@4370,1840
PC1: PC0:5.2 U1.16 | length 1909.5
  Top Layer w3.5: U1.16@3184.1,2847.74 3185,2848.64 v2(3185,2980)
  Bottom Layer w3.5: v2(3185,2980) 3605,2980 4280,2305 4280,2030 PC0:5.2@4370,1940
PC2: PC0:5.3 U1.17 | length 1813.3
  Top Layer w3.5: U1.17@3203.7,2847.74 3203.7,2968.74 v2(3240,3005)
  Bottom Layer w3.5: v2(3240,3005) 3595,3005 4295,2305 4295,2115 PC0:5.3@4370,2040
PC3: PC0:5.4 U1.18 | length 1720
  Top Layer w3.5: U1.18@3223.4,2847.74 3223.4,2958.44 v2(3295,3030)
  Bottom Layer w3.5: v2(3295,3030) 3295,3025.04 3590,3025.04 4310,2305.04 4310,2200.04 PC0:5.4@4370,2140
PC4: PC0:5.5 U1.33 | length 1296.5
  Top Layer w3.5: U1.33@3422.2,3046.54 3476.6,3046.54 v2(3480,3050)
  Bottom Layer w3.5: v2(3480,3050) 3580,3050 4370,2260 PC0:5.5@4370,2240
PC5: PC0:5.6 U1.34 | length 1272.5
  Top Layer w3.5: U1.34@3422.2,3066.24 3466.3,3066.24 v2(3495,3095)
  Bottom Layer w3.5: v2(3495,3095) 3516.73,3073.27 3571.73,3073.27 4305,2340 PC0:5.6@4370,2340
PD8: PD8:11.1 U1.55 | length 1289.9
  Top Layer w3.5: U1.55@3282.48,3442.24 3282.5,3497.54 3300,3515.04 4015,3515.04 4030,3530.04 4440,3530.04 PD8:11.1@4485,3575
PD9: PD8:11.2 U1.56 | length 1360
  Top Layer w3.5: U1.56@3262.8,3442.24 3262.8,3502.84 3290,3530.04 4000,3530.04 4095,3625.04 4445,3625.04 4485,3665.04 PD8:11.2@4485,3675
PD10: PD8:11.3 U1.57 | length 1421.3
  Top Layer w3.5: U1.57@3243.11,3442.24 3243.1,3513.14 3275,3545.04 3960,3545.04 4143.3,3728.34 4438.3,3728.34 PD8:11.3@4485,3775
PD11: PD8:11.4 U1.58 | length 1485.5
  Top Layer w3.5: U1.58@3223.43,3442.24 3223.4,3518.44 3265,3560.04 3950,3560.04 4209.7,3819.74 4429.7,3819.74 PD8:11.4@4485,3875
PE0: PE0:7.1 U1.97 | length 961.4
  Top Layer w3.5: v2(2480,2890) 2540,2950.04 2639.9,2950.04 2657.8,2967.84 U1.97@2827.76,2967.83
  Bottom Layer w3.5: v2(2480,2890) 2480,2450.04 PE0:7.1@2580,2350
PE1: PE0:7.2 U1.98 | length 1078.1
  Top Layer w3.5: v2(2450,2860) 2490,2860.04 2568.1,2938.14 2647.8,2938.14 2657.8,2948.14 U1.98@2827.8,2948.14
  Bottom Layer w3.5: v2(2450,2860) 2450,2380.04 PE0:7.2@2580,2250
PE2: PE0:7.3 U1.1 | length 1123.9
  Top Layer w3.5: PE0:7.3@2580,2150 2415,2315.04 2415,2649.64 2562.8,2797.74 2838.8,2797.74 U1.1@2888.8,2847.74
PE3: PE0:7.4 U1.2 | length 1345.6
  Top Layer w3.5: PE0:7.4@2580,2050 2385,2245.04 2385,2655.04 2540,2810.04 2803.8,2810.04 2886.1,2892.34 2897.3,2892.34 2908.5,2881.24 U1.2@2908.5,2847.74
PE4: PE0:7.5 U1.3 | length 1272.9
  Top Layer w3.5: U1.3@2928.1,2847.74 2928.1,2918.14 v2(2960,2950)
  Bottom Layer w3.5: PE0:7.5@2580,1950 2685,2055 2685,2675 v2(2960,2950)
PE5: PE0:7.6 U1.4 | length 1397.9
  Top Layer w3.5: U1.4@2947.8,2847.74 2947.8,2897.84 v2(3000,2950)
  Bottom Layer w3.5: PE0:7.6@2580,1850 2700,1970 2700,2650 v2(3000,2950)
PE6: PE0:7.7 U1.5 | length 1523
  Top Layer w3.5: U1.5@2967.5,2847.74 2967.5,2877.74 2997.5,2907.74 2997.8,2907.74 v2(3040,2950)
  Bottom Layer w3.5: PE0:7.7@2580,1750 2715,1885 2715,2625 v2(3040,2950)
PE7: PE0:7.8 U1.38 | length 2000.4
  Top Layer w3.5: v2(3065,3040) 3065,3055.04 3155,3145.04 U1.38@3422.24,3145
  Bottom Layer w3.5: PE0:7.8@2580,1650 2730.6,1800.64 2730.6,2610.64 3065,2945.04 v2(3065,3040)
RST: C20.1 JTAG/WD.7 KEY_RST.3 KEY_RST.4 R9.1 U1.14 | length 3976
  Top Layer w3.5: v2(2735,4280) 2882.14,4427.14 2975.78,4427.14 3109.54,4560.91 3109.54,4830.46 JTAG/WD.7@3065,4875 ; v2(3170,3120) 3124.7,3074.74 3124.7,2945.34 3144.7,2925.34 3144.7,2847.74 3144.7,2817.74 3167.5,2795.04 v2(3200,2795) ; R9.1@3755.34,2285 3755.3,2205.04 3757.4,2202.94 C20.1@3757.45,2190 3757.4,2100.04 3762.2,2095.24 KEY_RST.3@3762.16,2082.05 KEY_RST.4@3762.2,1837.94
  Bottom Layer w3.5: v2(2735,4280) 2735,3555 v2(3170,3120) ; v2(3200,2795) 3370,2795 3420,2745 3420,2620 ; 3420,2620.04 3420,2445.04 3470,2395.04 3690,2395.04 3755,2330.04 v2(3755,2285)
SPI1_MOSI: U1.91 U4.5 | length 567.8
  Top Layer w3.5: U4.5@2380,3375.61 2668,3087.64 2826.1,3087.64 U1.91@2827.76,3085.94
START_SW1: START_SW2.2 U1.51 | length 1257.4
  Top Layer w3.5: U1.51@3361.22,3442.24 3399,3480.04 3890.6,3480.04 ; 3890,3480 4024.4,3480 4100,3404.4 4100,3285 4230,3155 4320,3155 START_SW2.2@4375,3100.04
START_SW2: START_SW1.2 U1.52 | length 1270.3
  Top Layer w3.5: U1.52@3341.54,3442.24 3341.5,3480.64 3360.9,3500.04 3980,3500.04 ; 3980,3500 4025,3500 4120,3405 4120,3290 4150,3260 4330,3260 4375,3215 START_SW1.2@4375,3210.04
TEST_RX: SERIAL2.2 U1.83 | length 1472.6
  Top Layer w3.5: SERIAL2.2@1790,3975 2020,3975.04 2125,3870.04 2125,3645.04 2220,3550.04 2420,3550.04 2726.6,3243.44 U1.83@2827.76,3243.43
TEST_TX: SERIAL2.3 U1.80 | length 1492.5
  Top Layer w3.5: SERIAL2.3@1790,4075 1875,3990.04 2025,3990.04 2140,3875.04 2140,3645.04 2220,3565.04 2420,3565.04 2682.5,3302.54 U1.80@2827.76,3302.48
TOF_RX: SERIAL1.2 U1.87 | length 1265.7
  Top Layer w3.5: SERIAL1.2@1790,3545 1875,3630.04 2105,3630.04 2215,3520.04 2420,3520.04 2775.3,3164.74 U1.87@2827.76,3164.69
TOF_TX: SERIAL1.3 U1.86 | length 1228.6
  Top Layer w3.5: SERIAL1.3@1790,3645 2105,3645.04 2215,3535.04 2420,3535.04 2770.6,3184.44 U1.86@2827.76,3184.37
U1_49: C19.1 U1.49 | length 122.7
  Top Layer w10: U1.49@3422.24,3361.54 3495,3361.54 3525,3331.54 3525,3327.44 C19.1@3527.45,3325
U1_73: C18.2 U1.73 | length 127.7
  Top Layer w10: C18.2@2910,3562.45 2928.1,3544.34 U1.73@2928.1,3442.24
U1_94: R10.1 U1.94 | length 233
  Top Layer w3.5: R10.1@2599.66,3015 2609.7,3025.04 2825.9,3025.04 U1.94@2827.8,3026.84
U4_6: R7.1 U4.6 | length 79.4
  Top Layer w3.5: U4.6@2330,3375.61 R7.1@2330.34,3455
U5_1: R8.1 U5.1 | length 88.9
  Top Layer w7: R8.1@3530,4025.34 3530,3943.54 U5.1@3535,3938.5
VCC: 3V3.1 3V3.2 3V3.3 3V3.4 3V3.5 3V3.6 3V3.7 3V3.8 C2.1 C4.2 C5.1 C6.1 C11.1 C12.2 C13.2 C14.2 C15.2 C16.2 C17.2 C21.2 JTAG/WD.1 L1.1 R1.2 R2.2 R3.2 R4.2 R6.2 R8.2 R9.2 U1.6 U1.11 U1.19 U1.28 U1.50 U1.75 U1.100 U2.2 U2.4 U4.3 U4.7 U4.8 | length 10613.5
  Top Layer w10: U4.8@2230,3375.61 2225,3370.64 2225,3320.04 2245,3300.04 2280,3300.04 ; R6.2@2259.66,3075 C6.1@2327.45,3075 2327.4,3161.84 2330,3164.34 2330,3250.04 2280,3300.04 ; U4.7@2280,3375.61 2280,3300.04 ; C11.1@2635,2857.44 C12.2@2720,2857.44 2776.4,2857.44 U1.100@2827.8,2908.74 ; C16.2@2777.55,2695 2800,2695.04 2855,2750.04 2875,2750.04 2922.8,2797.74 2977.2,2797.74 2987.2,2807.74 U1.6@2987.2,2847.74 ; C13.2@2812.55,3590 2810,3587.44 2810,3521.04 U1.75@2888.78,3442.24 ; C21.2@3082.55,2420 3085.6,2423.04 U1.11@3085.6,2847.74 ; U1.19@3243.11,2847.76 3243.1,2807.84 3275.9,2775.04 3317.6,2775.04 C17.2@3370,2722.55 ; C17.2@3370,2722.54 3377.4,2730.04 v2(3705,2730) ; U1.28@3422.2,2947.64 3422.2,2947.54 C15.2@3585,2947.54 ; U1.50@3422.24,3381.22 3500,3381.24 3520,3401.24 3520,3402.54 C14.2@3527.45,3410
  Top Layer w20: v2(2545,2850) 2552.4,2850.04 2559.9,2857.44 C11.1@2635,2857.44 ; 3V3.8@2815,1660 3V3.5@2815,1960 3V3.4@2815,2060 3V3.3@2815,2160 3V3.2@2815,2260 ; 3V3.2@2815,2260 3V3.1@2815,2360 ; C21.2@3082.55,2420 3085,2417.54 v2(3085,2360) ; C15.2@3585,2947.54 3592.4,2955.04 3595,2955.04 v2(3675,3035) ; L1.1@3654.99,2632.45 3661.7,2632.44 3665,2629.14 v2(3705,2629.12) ; R9.2@3814.66,2285 v2(3815,2350)
  Top Layer w25: C6.1@2327.45,3075 2340,3062.44 v2(2340,2995) ; C16.2@2777.55,2695 2777.6,2672.54 v2(2640,2535) 3V3.1@2815,2360 ; C13.2@2812.55,3590 2825,3602.44 v2(2825,3695) ; v2(3085,2360) 3420,2360 v2(3480,2420) ; U2.2@3103.39,3975 U2.4@3326.61,3975 ; v2(3390,3660) v2(3390,3695) ; v2(3390,3695) 3390,3757.54 C4.2@3392.45,3760 C2.1@3392.45,3845 3392.4,3909.14 U2.4@3326.61,3975 ; 3390,4085 v2(3390,4235) ; v2(3525,3455) 3525,3420.04 3527.4,3420.04 C14.2@3527.45,3410 ; R8.2@3530,4084.64 3390.3,4084.64 3390,4085.04 3326.6,4021.64 U2.4@3326.61,3975 ; v2(3675,3035) 3705,3005 v2(3705,2826.93)
  Bottom Layer w10: v2(3705,2730) 3705,2792.69
  Bottom Layer w20: v2(2425,4575.04) 2425,4585.04 v2(2430,4725) ; 2430,4645.04 2980,4645.04 3050,4575.04 ; v2(2430,4725) 2430,4845.04 2460,4875.04 JTAG/WD.1@2465,4875 ; v2(2577.18,4580) 2577.18,4645.34 ; v2(2724.02,4580) 2725,4645 ; v2(3015,4580) 3045,4580 v2(3390,4235)
  Bottom Layer w25: v2(2340,2995) 2445,2995 2485,2955 2545,2895 v2(2545,2850) 2545,2630 v2(2640,2535) ; 3V3.1@2815,2360 v2(3085,2360) ; v2(2825,3695) v2(3390,3695) ; v2(3390,3660) 3525,3525 v2(3525,3455) 3625,3455 3675,3405 v2(3675,3035) ; v2(3480,2420) 3635,2425 3705,2475 ; v2(3705,2826.93) v2(3705,2629.12) 3705,2475 ; v2(3815,2350) 3815,2365 3705,2475
VDDA: C22.2 C23.2 L1.2 U1.21 U1.22 | length 568.5
  Top Layer w10: U1.21@3282.5,2847.74 U1.22@3302.2,2847.74 ; U1.22@3302.17,2847.76 3302.2,2887.84 3324.4,2910.04 v2(3350,2910) ; C22.2@3475,2687.54 C23.2@3570,2687.54 ; C23.2@3570,2687.55 L1.2@3654.99,2687.55
  Bottom Layer w10: v2(3350,2910) 3475,2785 v2(3475,2690)
pads on no net: U1.7 U1.23 U1.36 U1.37 U1.39 U1.41 U1.43 U1.44 U1.45 U1.46 U1.53 U1.54 U1.61 U1.62 U1.65 U1.66 U1.78 U1.79 U1.81 U1.82 U1.84 U1.85 U1.88
copper on no net:
  other v2: 3155,3045

## Polygon pours and split planes (outlines as drawn)
GND on Bottom Layer (solid): 1625,4995 4585,4995 4585,1535 4600,1520 1510,1515 1500,1525
GND on Top Layer (solid): 1660,4955 4595,4955 4600,4960 4600,1510 4595,1505 1600,1505 1595,1500

## Keep-outs
Keep-Out Layer:
  lines w10: 1700,1684.1 ccw(c1800,1684.1) 1800,1584.1 ; 1700,4830.6 cw(c1800,4830.6) 1800,4930.6 ; 4434.6,1584.1 ccw(c4434.6,1684.1) 4534.6,1684.1 ; 4434.6,4930.6 cw(c4434.6,4830.6) 4534.6,4830.6